# Altium PCB 遥控器.PcbDoc
Units mil, origin at the board's own origin, x right, y up, seen from the top; angles counter-clockwise.
Board outline 3937.01 x 1968.5 mil, 2 copper layers (Top Layer, Bottom Layer); 57 components, 45 nets, 221 pads, 92 vias.
Unrouted connection lines stored in the file: 56.
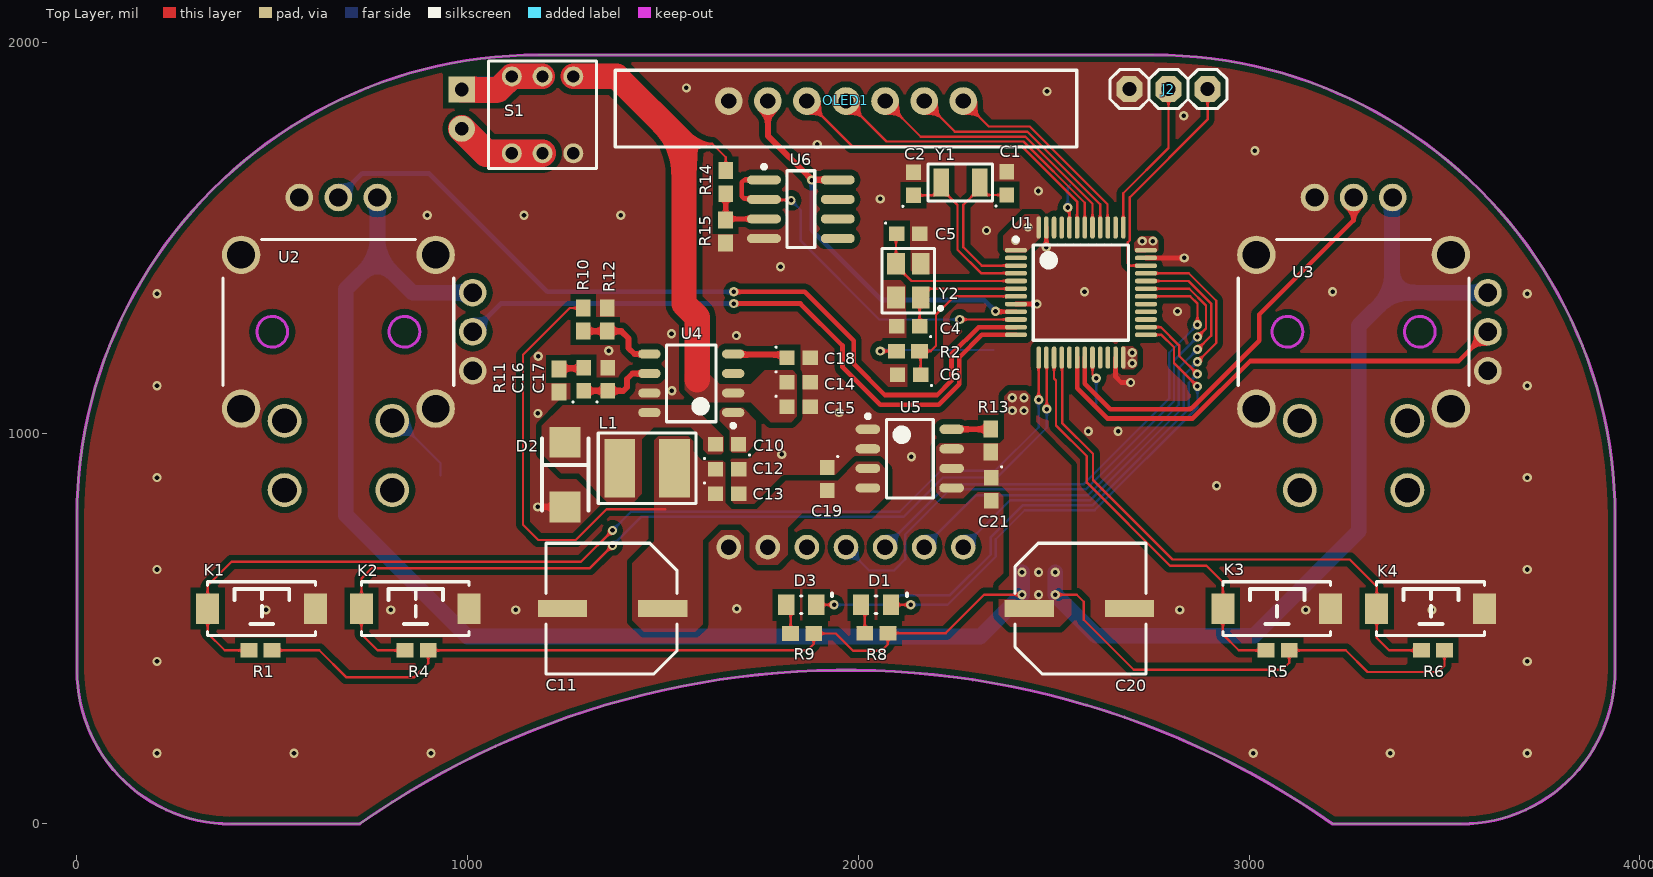
[diagram p0: Top Layer view]
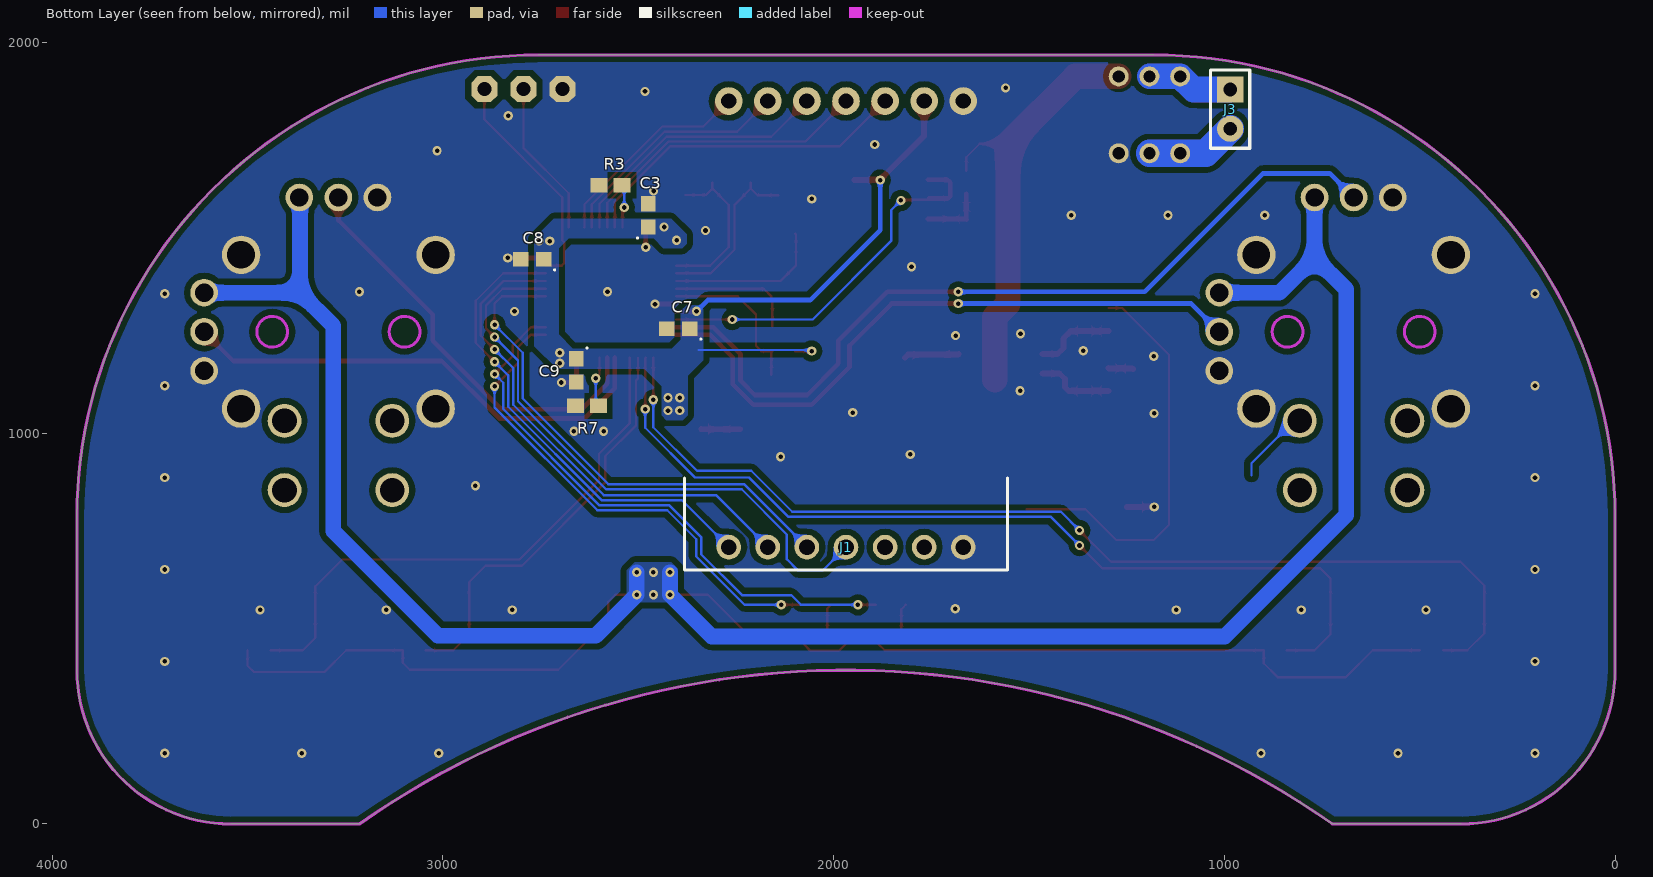
[diagram p1: Bottom Layer view, seen from below]

## Layer stack, top to bottom
Top Solder: solder mask 0.4, Solder Resist, Dk 3.5
Top Layer: signal copper 1.4
Dielectric 1: dielectric 12.6, FR-4, Dk 4.8
Bottom Layer: signal copper 1.4
Bottom Solder: solder mask 0.4, Solder Resist, Dk 3.5

## Board outline
393.7,0 cw(c393.7,393.7) 0,393.7 0,787.4 cw(c1181.1,787.4) 1181.1,1968.5 2755.91,1968.5 cw(c2755.91,787.4) 3937.01,787.4 3937.01,393.7 cw(c3543.31,393.7) 3543.31,0 3213.5,0 ccw(c1968.5,-1771.65) 724.01,0.35

## Design rules (kind name [scope] priority, off if disabled: settings)
Clearance "BOTTOM GND" [InNamedPolygon('Top Layer All GND')] p1: gap=15 ignorepadtopadclearanceinfootprint=FALSE
Clearance "TOP GND" [InNamedPolygon('Top Layer All GND')] p2: gap=15 ignorepadtopadclearanceinfootprint=FALSE
Clearance poly [InPolygon] p3: gap=9 ignorepadtopadclearanceinfootprint=FALSE
Clearance [All] p4: gap=6 ignorepadtopadclearanceinfootprint=FALSE
MinimumSolderMaskSliver [All] p1: minsoldermaskwidth=4
PlaneConnect [All] p1: planeconnectstyle=Direct reliefexpansion=20 reliefentries=4 reliefconductorwidth=10 reliefairgap=10
PolygonConnect [All] p1: connectstyle=Direct reliefconductorwidth=10 reliefentries=4 polygonreliefangle="90 Angle" airgapwidth=10
RoutingVias [All] p1: holewidth=11.81 width=23.62 viastyle="Through Hole" minholewidth=7.87 minwidth=19.68 maxholewidth=55.12 maxwidth=78.74
SilkToSilkClearance [All] p1: silktosilkclearance=0
SilkToSolderMaskClearance [IsPad] p1: minsilkscreentomaskgap=2 clearancetoexposedcopper=TRUE
SolderMaskExpansion [All] p1: expansion=4 istentingtop=FALSE
Width [All] p1: maxlimit=200 minlimit=6 preferedwidth=6
26 further rules are at their usual default settings.

## Components (designator, comment, footprint, x,y, rotation, side; value= is the part's Value field where it differs from the comment)
C1 "12pF" cap0603 2379.68,1639.5 r90 top
C2 "12pF" cap0603 2141.22,1638.57 r90 top
C3 "0.1uF" cap0603 2475.01,1557.5 r90 bottom
C4 "20pF" cap0603 2127.5,1274.37 r180 top
C5 "20pF" cap0603 2127.5,1510.94 r0 top
C6 "0.1uF" cap0603 2129.92,1149.44 r180 top
C7 "0.1uF" cap0603 2397.67,1267.85 r0 bottom
C8 "0.1uF" cap0603 2771.8,1445.44 r0 bottom
C9 "0.1uF" cap0603 2658.44,1160.77 r270 bottom
C10 "0.1uF" cap0603 1663.88,971.48 r180 top
C11 "470uF" Cap8x10.5mm 1496.06,551.18 r0 top
C12 "0.1uF" cap0603 1664.01,908.02 r0 top
C13 "0.1uF" cap0603 1664.01,845.4 r0 top
C14 "0.1uF" cap0603 1847.01,1130.33 r0 top
C15 "0.1uF" cap0603 1847.01,1067.7 r0 top
C16 "0.1uF" cap0603 1296.83,1138.01 r90 top
C17 "0.1uF" cap0603 1358.47,1138.01 r90 top
C18 "0.1uF" cap0603 1847.01,1193.26 r0 top
C19 "0.1uF" cap0603 1920.26,882.98 r270 top
C20 "470uF" Cap8x10.5mm 2440.94,551.18 r180 top
C21 "0.1uF" cap0603 2339.78,856.5 r270 top
D1 "LED" LED 2045.43,561.02 r0 top
D2 "SS54" SMA(DO-214AC) 1249.02,894.26 r270 top
D3 "LED" LED 1853.91,561.02 r0 top
J1 "1x7m" uart_nrf24l01 1968.5,708.66 r90 bottom locked
J2 "1X3" HDR-1X3_SWD 2894.02,1880.83 r180 top
J3 "1X2" HDR-1X2 985.15,1879.5 r270 bottom
K1 "KEY" key 472.44,551.18 r0 top locked
K2 "KEY" key 866.14,551.18 r0 top locked
K3 "KEY" key 3070.87,551.18 r0 top locked
K4 "KEY" key 3464.57,551.18 r0 top locked
L1 "10uH" CD43 1459.46,910.57 r90 top
OLED1 "2.541x7母排" LQ_OLED128X64去丝印 1968.5,1850.39 r0 top locked
R1 "1K" res0603 470.08,444.49 r180 top
R2 "10K" res0603 2127.56,1210.39 r0 top
R3 "10K" res0603 2571.33,1634.93 r0 bottom
R4 "1K" res0603 869.77,444.49 r180 top
R5 "1K" res0603 3073.41,444.49 r180 top
R6 "1K" res0603 3470.63,444.49 r180 top
R7 "10K" res0603 2631.83,1070.02 r0 bottom
R8 "1K" res0603 2045.99,488.6 r180 top
R9 "1K" res0603 1856.35,487.68 r180 top
R10 "10.2K" res0603 1296.13,1290.96 r270 top
R11 "Res" res0603 1233.93,1135.04 r270 top value=21K
R12 "1.91K" res0603 1357.47,1291.04 r90 top
R13 "Res" res0603 2338.95,981.3 r90 top value=250K
R14 "Res" res0603 1660.7,1642.65 r270 top value=30K
R15 "10K" res0603 1659.95,1516.89 r270 top
S1 "自锁开关" 6pswitch7*7mm 1191.83,1814.98 r0 top
U1 "STM32F103C8T6" LQFP-48_7x7x05P 2569.88,1360.21 r0 top locked
U2 "手柄摇杆电位器" 摇杆 669.29,1259.84 r0 top locked
U3 "手柄摇杆电位器" 摇杆 3267.72,1259.84 r0 top locked
U4 "TPS54231DR" SOIC-8_150mil 1572.59,1128.02 r180 top
U5 "TPS7333" SOP8 2131.78,935.17 r0 top
U6 "LMV358" OPA2350 1853.07,1573.63 r0 top
Y1 "32.768K" SMD3215 2261.31,1642.05 r180 top
Y2 "8MHz" SMD3225 2128.02,1390.83 r90 top

## Footprints (in the part's own frame and the unit in brackets; to place one, negate y for a bottom-side part, rotate by r counter-clockwise, add the part's x,y. Pads: shape width x height; smd on the part's side, far side on the other; paste and mask are expansions set on the pad)
6pswitch7*7mm [mm]
  round 1.3 hole 0.8: 1(2,2.5) 2(0,2.5) 3(-2,2.5) 4(-2,-2.5) 5(0,-2.5) 6(2,-2.5)
  silkscreen extent -3.5,-3.5 3.5,3.5
Cap8x10.5mm [mm] "for 470uf"
  rect 3.2x1.1 smd: 1(0.089,0) 2(-6.439,0)
  silkscreen extent -7.5,-4.25 1,4.25, body extent -7.5,-4 0.5,4, height 10
cap0603 [mm] "Chip Capacitor, 2-Leads, Body 1.60x0.80mm, IPC Medium Density"
  rect 1x0.95 smd: 1(-0.75,0) 2(0.75,0)
  silkscreen extent -1.51,0.64 -1.41,0.74, body extent -0.85,-0.45 0.85,0.45, height 0.6
CD43 [mm]
  rect 3.8x2 smd: 1(0,1.778) 2(0,-1.778)
  silkscreen extent -2.29,-3.17 2.29,3.18, body extent -2,-2.54 2,2.54, height 3.7
HDR-1X2 [mm]
  rect 1.7x1.7 hole 0.9: 1(0,0)
  round 1.7 hole 0.9: 2(2.54,0)
  silkscreen extent -1.27,-1.27 3.81,1.27, body extent -1.27,-1.27 3.81,1.27, height 8.5
HDR-1X3_SWD [mm]
  oct 1.7x1.7 hole 0.9: 1(0,0) 2(2.54,0) 3(5.08,0)
  silkscreen extent -1.27,-1.27 6.35,1.27
key [mm] "3*6*2.5"
  rect 1.5x2 smd: 1(3.5,0) 2(-3.5,0)
  silkscreen extent -3.5,-1.75 3.5,1.75, body extent -3.97,-1.74 4.03,1.76, height 2.59
LED [mm] "0805"
  rect 1.05x1.35 smd: 1(-0.975,0) 2(0.975,0)
  silkscreen extent -0.05,-0.58 2,0.75, body extent -1.05,-0.67 1.05,0.67, height 0.6
LQ_OLED128X64去丝印 [mm]
  round 1.8 hole 1: 1(-7.62,0) 2(-5.08,0) 3(-2.54,0) 4(0,0) 5(2.54,0) 6(5.08,0) 7(7.62,0)
  round 1.8 on Top Overlay: ""(-13.307,0.105) ""(13.293,0.105)
  silkscreen extent -15,-3 15,2, body extent -15,-23 15,2, height 8.5
LQFP-48_7x7x05P [mm]
  oval 1.45x0.3 smd: 1(-4.225,2.75) 2(-4.225,2.25) 3(-4.225,1.75) 4(-4.225,1.25) 5(-4.225,0.75) 6(-4.225,0.25) 7(-4.225,-0.25) 8(-4.225,-0.75) 9(-4.225,-1.25) 10(-4.225,-1.75) 11(-4.225,-2.25) 12(-4.225,-2.75) 25(4.225,-2.75) 26(4.225,-2.25) 27(4.225,-1.75) 28(4.225,-1.25) 29(4.225,-0.75) 30(4.225,-0.25) 31(4.225,0.25) 32(4.225,0.75) 33(4.225,1.25) 34(4.225,1.75) 35(4.225,2.25) 36(4.225,2.75)
  oval 0.3x1.45 smd: 13(-2.75,-4.225) 14(-2.25,-4.225) 15(-1.75,-4.225) 16(-1.25,-4.225) 17(-0.75,-4.225) 18(-0.25,-4.225) 19(0.25,-4.225) 20(0.75,-4.225) 21(1.25,-4.225) 22(1.75,-4.225) 23(2.25,-4.225) 24(2.75,-4.225) 37(2.75,4.225) 38(2.25,4.225) 39(1.75,4.225) 40(1.25,4.225) 41(0.75,4.225) 42(0.25,4.225) 43(-0.25,4.225) 44(-0.75,4.225) 45(-1.25,4.225) 46(-1.75,4.225) 47(-2.25,4.225) 48(-2.75,4.225)
  silkscreen extent -4.35,-3.1 3.1,3.57, body extent -3.5,-3.5 3.5,3.5, height 1.6
OPA2350 [mm] "SOIC, 8-Leads, Body 4.9x3.9mm, Pitch 1.27mm, IPC Medium Density"
  oval 2.2x0.6 smd: 1(-2.4,1.905) 2(-2.4,0.635) 3(-2.4,-0.635) 4(-2.4,-1.905) 5(2.4,-1.905) 6(2.4,-0.635) 7(2.4,0.635) 8(2.4,1.905)
  silkscreen extent -2.52,-2.5 0.9,2.88, body extent -1.95,-2.45 1.95,2.45, height 1.75
res0603 [mm]
  rect 1.1x0.95 smd: 1(-0.75,0) 2(0.75,0)
  body extent -0.8,-0.38 0.8,0.42, height 0.45
SMA(DO-214AC) [mm] "SS系列肖特基二极管"
  rect 2x2 smd: 1(2.1,0) 2(-2.1,0)
  silkscreen extent -2.35,-1.5 2.35,1.52
SMD3215 [mm] "有源晶振"
  rect 1x1.8 smd: 1(-1.25,0) 2(1.25,0)
  silkscreen extent -2.1,-1.2 2.1,1.2
SMD3225 [mm] "有源晶振"
  rect 1.4x1.15 smd: 1(-1.1,-0.8) 2(1.1,-0.8) 3(1.1,0.8) 4(-1.1,0.8)
  silkscreen extent -2.1,-2.2 2.1,1.7
SOIC-8_150mil [mm]
  oval 1.45x0.6 smd: 1(-2.725,1.905) 2(-2.725,0.635) 3(-2.725,-0.635) 4(-2.725,-1.905) 5(2.725,-1.905) 6(2.725,-0.635) 7(2.725,0.635) 8(2.725,1.905)
  silkscreen extent -2.85,-2.5 1.6,2.88, body extent -2,-2.5 2,2.5, height 1.75
SOP8 [mm] "SOP, 8-Leads, Body 5.1x4.1mm (max), Pitch 1.27mm, IPC Medium Density"
  oval 1.6x0.6 smd: 1(-2.725,1.905) 2(-2.725,0.635) 3(-2.725,-0.635) 4(-2.725,-1.905) 5(2.725,-1.905) 6(2.725,-0.635) 7(2.725,0.635) 8(2.725,1.905)
  silkscreen extent -2.85,-2.55 1.52,2.88, body extent -2.06,-2.56 2.06,2.57, height 1.8
uart_nrf24l01 [mm] "无线串口模块"
  round 1.6 hole 1.02: 1(0,7.62) 2(0,5.08) 3(0,2.54) 4(0,0) 5(0,-2.54) 6(0,-5.08) 7(0,-7.62)
  silkscreen extent -1.5,-10.5 4.5,10.5, body extent -1.5,-10.5 45.55,10.5, height 6.1
摇杆 [mm]
  round 1.8 hole 1.2: 1(8.73,-2.54) 2(8.73,0) 3(8.73,2.54) 4(2.54,8.73) 5(0,8.73) 6(-2.54,8.73)
  round 2.5 hole 1.8: 7(-6.325,5) 8(-6.325,-5) 9(6.325,-5) 10(6.325,5)
  round 2.2 hole 1.6: a(-3.5,-5.792) b(-3.5,-10.292) c(3.5,-5.792) d(3.5,-10.292)
  Keep-Out Layer circle w0.2: c-4.3,0 r1
  Keep-Out Layer circle w0.2: c4.3,0 r1
  silkscreen extent -7.5,-3.5 7.5,6

## Part data
C1 C2 C3 C4 C5 C6 C7 C8 C9 C10 C12 C13 C14 C15 C16 C17 C18 C19 C21: library part Cap, "贴片电容", LatestRevisionDate=17-Jul-2002, LatestRevisionNote="Re-released for DXP Platform.", PackageReference=RAD-0.3, Published=8-Jun-2000, Publisher="Altium Limited"
C11 C20: library part "Cap Pol", "贴片电解电容 8*10.5mm", LatestRevisionDate=17-Jul-2002, LatestRevisionNote="Re-released for DXP Platform.", PackageReference=POLAR0.8, Published=8-Jun-2000, Publisher="Altium Limited"
D1 D3: "贴片0805", PackageDocument=Feb-2002, LatestRevisionDate=17-Jul-2002, LatestRevisionNote="Re-released for DXP Platform.", PackageReference=3.2X1.6X1.1, Published=8-Jun-2000, Publisher="Altium Limited"
D2: library part "D Schottky", "Schottky Diode", Code_JEDEC=DO-214-AA, LatestRevisionDate=17-Jul-2002, LatestRevisionNote="Re-released for DXP Platform.", PackageReference=SMB, Published=8-Jun-2000, Publisher="Altium Limited"
J1: library part 无线串口模块, "2.54mm母排座"
J2: library part "Header 3", "2.54mm公排针", BOM名称=3P接插件, 版权归属=源创客, 学习资源=www.ooocke.com
J3: library part "Header 2", "不用焊", BOM名称=2P接插件, 版权归属=源创客, 学习资源=www.ooocke.com
K1 K2 K3 K4: "按键", BOM名称=3x6轻触开关, 版权归属=源创客, 学习资源=www.ooocke.com
L1: library part Inductor, "贴片功率电感", Code_IEC=1005, Code_JEITA=0402, LatestRevisionDate=17-Jul-2002, LatestRevisionNote="Re-released for DXP Platform.", PackageReference=0402-A, Published=8-Jun-2000, Publisher="Altium Limited"
OLED1: library part OLED
R1 R2 R3 R4 R5 R6 R7 R8 R9 R10 R12 R15: library part Res, "贴片电阻", LatestRevisionDate=17-Jul-2002, LatestRevisionNote="Re-released for DXP Platform.", PackageReference=AXIAL-0.4, Published=8-Jun-2000, Publisher="Altium Limited"
R11 R13 R14: "贴片电阻", LatestRevisionDate=17-Jul-2002, LatestRevisionNote="Re-released for DXP Platform.", PackageReference=AXIAL-0.4, Published=8-Jun-2000, Publisher="Altium Limited"
S1: "按键六脚开关,自锁7*7mm"
U2 U3: "型号RKJXV1224005"
U4: "DC-DC芯片,3.5V~28V输入,2A输出"
U5: "TPS73系列电源IC"
U6: "运放", Code_IPC=SOIC127P600-8, Code_JEDEC=MS-012-AA, ComponentLink1Description="Manufacturer Link", ComponentLink1URL=http://www.onsemi.com/site/products/parametrics/0,4446,251,00.html, ComponentLink2Description=Datasheet, ComponentLink2URL=http://www.onsemi.com/pub/Collateral/LM358-D.PDF, DatasheetVersion=1988, LatestRevisionDate=13-Apr-2006, LatestRevisionNote="IPC-7351 Footprint Added.", PackageDescription="8-Pin Small Outline Integrated Circuit 1.27 mm Pitch", PackageReference=751-02, Published=17-Jul-2002, Publisher="Altium Limited"
Y1: library part CRYSTAL, "晶振 32.768KHZ 12.5PF"
Y2: library part CRYSTAL_JXS63, "无源晶振 8MHZ 20pF 3.2X2.5MM SMD"

## Via types
v1: diameter 23.62, hole 11.81, Top Layer to Bottom Layer, tented both sides, 92 vias

## Nets (pads, with @x,y where several pads share a name; then routed paths per layer and width w, separated by ;. In a path a pad name is that pad's centre, name@x,y a point inside that pad or via, vN(x,y) a via of type N, cw(c..) or ccw(c..) an arc to the next point about the centre after c; other vN are vias at no path point)
3.3V: C3.1 C7.1 C8.1 C9.1 C20.1 C21.1 OLED1.2 R1.1 R2.1 R4.1 R5.1 R6.1 R8.1 R9.1 R13.1 U1.1 U1.9 U1.24 U1.36 U1.48 U2.3 U2.4 U3.3 U3.4 U5.5 U5.6 U5.7 U6.8 | length 9931.5
  Top Layer w6: R1.1 620.51,444.49 689,376 864,376 899.3,411.3 R4.1 1869.49,444.49 1885.87,460.87 R9.1 1942.32,487.68 1987,443 2059,443 2075.52,459.52 R8.1 2223.6,488.6 2322,587 v1(2419,587) ; v1(2056.39,1210.39) R2.1 ; v1(2504,587) 2559,587 2577,569 2577,523 2705,395 3085,395 3102.94,412.94 R5.1 3247.51,444.49 3303,389 3484,389 3500.16,405.16 R6.1
  Top Layer w12: v1(2351,1312.13) 2352.03,1311.09 2403.44,1311.09 U1.9
  Top Layer w15: U2.4@769.29,1602.96 769,1603.25 U2.4 ; OLED1.2 1768.5,1761.5 1881.37,1648.63 U6.8
  Bottom Layer w6: v1(2056.39,1210.39) 2059,1213 2345,1213
  Bottom Layer w12: v1(1881,1648) 1881,1520 2060,1341 2322.13,1341 v1(2351,1312.13)
  Bottom Layer w40: U2.4 769.29,1449.71 ; U2.3 859.16,1359.84 769.29,1449.71 ; v1(2419,644.33) v1(2419,587) 2312,480 999,480 688,791 688,1368.42 769.29,1449.71 ; v1(2504,644.33) v1(2504,587) 2609,482 3013,482 3281,750 3281,1275 3365.84,1359.84 ; U3.4 3365.84,1601.67 3365.84,1359.84 ; U3.3 3365.84,1359.84
  other v1: 2461.5,587 2461.5,644.33 2394,1058 2424,1058 2394,1091 2424,1091 2701,1179 2701,1206 2727,1492 2754,1492 2402,1494 2434,1528
5V: C11.1 C12.1 C13.1 C19.2 J1.6 L1.2 R10.1 U5.3 U5.4 | length 1051.5
  Top Layer w6: R10.1 1261.49,1320.49 1142,1201 1142,766 1181,727 1277,727 1356,806 1506,806
ADC_BAT: U1.10 U6.1 U6.2 | length 973.2
  Top Layer w6: U6.2@1756.36,1600.85 U6.2 1759.9,1597.31 1826.69,1597.31 v1(1828,1596) ; v1(2259.68,1291.32) U1.10
  Top Layer w12: U6.2@1756.36,1600.85 1708.15,1600.85 1702,1607 1702,1641.97 1709.03,1649 1758.21,1649 U6.1
  Bottom Layer w6: v1(1828,1596) 1853,1571 1853,1492 2053.68,1291.32 v1(2259.68,1291.32)
DC_IN: C14.1 C15.1 R14.1 S1.1 U4.2 | length 1128.1
  Top Layer w6: 1554,1741 1626,1741 1660.7,1706.3 R14.1
  Top Layer w65: S1.1 1381.6,1913.4 1554,1741 1554,1331 1588,1297 1588,1137
GND: C1.2 C2.2 C3.2 C4.2 C5.2 C6.2 C7.2 C8.2 C9.2 C11.2 C12.2 C13.2 C14.2 C15.2 C17.2 C18.2 C19.1 C20.2 C21.2 D2.1 J1.7 J2.3 K1.1 K2.1 K3.1 K4.1 OLED1.1 R3.2 R7.2 R11.2 R12.2 R15.2 S1.6 U1.8 U1.23 U1.35 U1.47 U2.1 U2.6 U2.7 U2.8 U2.9 U2.10 U3.1 U3.6 U3.7 U3.8 U3.9 U3.10 U4.7 U5.1 U5.2 U6.4 Y2.2 Y2.4 | length 365.7
  Top Layer w12: U1.8 v1(2457.31,1330.69) ; v1(2481.3,1476) U1.47 ; U1.23 2658.46,1144.54 2673,1130 v1(2697,1130) ; U1.35 v1(2834.2,1448.8)
  Top Layer w15: v1(1179.58,811.58) D2.1
  other v1: 205,181 555.7,181 906.4,181 3010.6,181 3361.3,181 3712,181 205,416.2 3712,416.2 484,548 803.5,548 1123,548 2823,548 3145.5,548 3468,548 1689,551 205,651.4 3712,651.4 2917,866 205,886.6 3712,886.6 2136,940 1804,946 2589,1005 2665,1005 1180,1051 1951,1053 1523,1109 205,1121.8 3712,1121.8 1181,1197 1361,1211 1688,1250 1522,1255 2817,1312 205,1357 3712,1357 2579,1362 3214,1362 1801,1426 2328,1519 897,1558 1144.5,1558 1392,1558 2056,1600 2461,1620 3015,1723 1895,1739 2833,1813 2483,1875 1560,1884
KEY1: K1.2 R1.2 U1.13 | length 2718.7
  Top Layer w6: R1.2 378.51,444.49 334.65,488.35 K1.2 334.65,609.65 396,671 1290.38,671 v1(1370.88,751.5) ; v1(2461.61,1085.61) U1.13
  Bottom Layer w6: v1(1370.88,751.5) 1418.38,799 2106,799 2211,904 2350,904 2461.61,1015.61 v1(2461.61,1085.61)
KEY2: K2.2 R4.2 U1.14 | length 2365.6
  Top Layer w6: R4.2 769.51,444.49 728.35,485.65 K2.2 728.35,628.35 755,655 1313,655 v1(1370.88,712.88) ; U1.14 2482.42,1192.75 v1(2482.42,1062)
  Bottom Layer w6: v1(1370.88,712.88) 1444,786 2116,786 2217,887 2355,887 2482.42,1014.42 v1(2482.42,1062)
KEY3: K3.2 R5.2 U1.15 | length 1070.1
  Top Layer w6: U1.15 2500.98,1140.02 2506,1135 2506,1020 2585,941 2585,873.82 2797.82,661 2891,661 2933.07,618.93 K3.2 2933.07,484.93 2973.51,444.49 R5.2
KEY4: K4.2 R6.2 U1.16 | length 1444.5
  Top Layer w6: U1.16@2521.69,1193.87 2521.69,1026.5 2600.69,947.5 2600.69,880.31 2804,677 3258,677 3326.77,608.23 K4.2 3326.77,476.23 3358.51,444.49 R6.2
L_X: U1.12 U2.2 | length 1673.5
  Top Layer w12: v1(1681,1332) 1852,1332 1959.31,1224.68 1959.31,1169.85 2055.85,1073.32 2205.31,1073.32 2258,1126 2258,1194 2315.95,1251.95 U1.12
  Bottom Layer w12: U2.2 1085.15,1332 v1(1681,1332)
L_Y: U1.11 U2.5 | length 2140.9
  Top Layer w12: v1(1681,1362) 1863,1362 1988,1237 1988,1178 2068,1098 2202.16,1098 2238.31,1134.15 2238.31,1202.15 2307.79,1271.63 U1.11
  Bottom Layer w12: U2.5 730.75,1665 901,1665 1204,1362 v1(1681,1362)
LED1: D1.2 U1.25 | length 1283
  Top Layer w6: D1.2 v1(2133.98,561.02) ; U1.25 2776.05,1251.95 2808,1220 2808,1180 v1(2868,1120)
  Bottom Layer w6: v1(2133.98,561.02) 2228.02,561.02 2352,685 2352,729 2425.82,802.82 2604.82,802.82 2868,1066 v1(2868,1120)
LED2: D3.2 U1.26 | length 1482.7
  Top Layer w6: D3.2 v1(1937.98,561.02) ; U1.26 2774.37,1271.63 2821,1225 2821,1198.6 v1(2868,1151.6)
  Bottom Layer w6: v1(1937.98,561.02) 2084.02,561.02 2108.73,585.73 2234.73,585.73 2339.27,690.27 2339.27,734.27 2420.55,815.55 2599.55,815.55 2846,1062 2846,1129.6 v1(2868,1151.6)
NetC1_1: C1.1 U1.3 Y1.1 | length 413.3
  Top Layer w6: Y1.1 Y1.1@2310.53,1626.66 ; C1.1 2327.21,1609.97 Y1.1@2310.53,1626.66 ; U1.3 2315.89,1429.11 2269,1476 2269,1584.77 2310.53,1626.3 Y1.1@2310.53,1626.66
NetC2_1: C2.1 U1.4 Y1.2 | length 442.2
  Top Layer w6: C2.1 2194.85,1609.04 Y1.2@2212.1,1626.3 ; Y1.2 Y1.2@2212.1,1626.3 ; U1.4 2403.08,1409.89 2313.9,1409.89 2254,1469.79 2254,1584.4 Y1.2@2212.1,1626.3
NetC4_1: C4.1 U1.6 Y2.1 | length 329.2
  Top Layer w6: C4.1 2157.03,1345.03 Y2.1 2159.52,1350.42 2179.16,1370.06 U1.6
NetC5_1: C5.1 U1.5 Y2.3 | length 405.7
  Top Layer w6: C5.1 2096.53,1509.49 Y2.3 2096.53,1429.21 2136,1389.74 U1.5
NetC10_1: C10.1 U4.1
NetC10_2: C10.2 D2.2 L1.1 U4.8
NetC16_1: C16.1 C17.1 U4.6 | length 199.2
  Top Layer w15: C16.1 C17.1 1398.48,1108.48 1408,1118 1408,1139 1422.02,1153.02 U4.6
NetC16_2: C16.2 R11.1 | length 64.1
  Top Layer w15: R11.1 1235.42,1166.05 1295.34,1166.05 C16.2
NetC18_1: C18.1 U4.4 | length 141.6
  Top Layer w15: U4.4 1681.52,1201.37 1809.37,1201.37 C18.1
NetD1_1: D1.1 R8.2 | length 76.3
  Top Layer w6: D1.1 2016.46,551.61 R8.2
NetD3_1: D3.1 R9.2 | length 78
  Top Layer w6: D3.1 1826.82,549.72 R9.2
NetJ3_1: J3.1 S1.2 S1.3 | length 442.2
  Top Layer w65: J3.1 986.11,1878.53 1078.22,1878.53 S1.3 S1.2
  Bottom Layer w65: J3.1 1079.18,1879.5 S1.3 S1.2
NetJ3_2: J3.2 S1.4 S1.5 | length 465.5
  Top Layer w70: J3.2 1048.1,1716.55 S1.4 S1.5
  Bottom Layer w70: J3.2 1048.1,1716.55 S1.4 S1.5
NetR3_1: R3.1 U1.44 | length 112.6
  Top Layer w6: v1(2536,1578) 2540.35,1573.65 U1.44
  Bottom Layer w6: v1(2536,1578) 2536,1629.13 R3.1
NetR7_1: R7.1 U1.20 | length 130.6
  Top Layer w6: U1.20 2599.41,1150.59 v1(2609,1141)
  Bottom Layer w6: R7.1 2609,1076.72 v1(2609,1141)
NetR10_2: R10.2 R12.1 U4.5 | length 208.1
  Top Layer w15: R10.2 R10.2 R12.1 R12.1 1393.49,1261.51 1412,1243 1412,1218 1427,1203 U4.5
NetR13_2: R13.2 U5.8 | length 100.2
  Top Layer w15: U5.8 2239.39,1010.5 2338.62,1010.5 R13.2
NetR14_2: R14.2 R15.1 U6.3 | length 165.5
  Top Layer w12: R15.1 R15.1@1660.7,1547.17 ; R14.2 R15.1@1660.7,1547.17 ; U6.3 1662.16,1548.63 R15.1@1660.7,1547.17
NRST: C6.1 R2.2 U1.7 | length 413.2
  Top Layer w6: C6.1 2159.44,1208.03 R2.2 2185.39,1210.39 2199,1224 2199,1304 2245.37,1350.37 U1.7
OLED_CLK: OLED1.3 U1.43 | length 864.6
  Top Layer w6: OLED1.3 1983.9,1735 2418,1735 2560.04,1592.96 U1.43
OLED_CS: OLED1.7 U1.39 | length 538.8
  Top Layer w6: OLED1.7 2333.69,1785.2 2438.8,1785.2 2637.66,1586.34 2637.66,1527.66 U1.39
OLED_DC: OLED1.6 U1.40 | length 619.5
  Top Layer w6: OLED1.6 2247.13,1771.77 2433.23,1771.77 2619.09,1585.91 U1.40
OLED_RST: OLED1.5 U1.41 | length 700.8
  Top Layer w6: OLED1.5 2159.88,1759.02 2427.95,1759.02 2599.41,1587.57 U1.41
OLED_SDA: OLED1.4 U1.42 | length 782.7
  Top Layer w6: OLED1.4 2071.88,1747.02 2422.98,1747.02 2579.72,1590.28 U1.42
PA11: J1.2 U1.32 | length 1286.5
  Top Layer w6: U1.32 2845.26,1389.74 2903,1332 2903,1249.8 v1(2868,1214.8)
  Bottom Layer w6: J1.2 2301.56,841.72 2588.72,841.72 2820,1073 2820,1166.8 v1(2868,1214.8)
PA12: J1.1 U1.33 | length 1227.7
  Top Layer w6: U1.33 2845.57,1409.43 2916,1339 2916,1231.2 v1(2868,1183.2)
  Bottom Layer w6: J1.1 2388.83,828.99 2593.99,828.99 2833,1068 2833,1148.2 v1(2868,1183.2)
R_X: U1.18 U3.2 | length 1254.1
  Top Layer w12: U1.18 U1.18 2560.04,1193.8 2560.04,1114.96 2637,1038 2856,1038 3003,1185 3536.57,1185 U3.2
R_Y: U1.19 U3.5 | length 1078.3
  Top Layer w12: U1.19 2579.72,1127.28 2645.19,1061.81 2845.84,1061.81 ccw(c2845.84,1073.81) 2854.3,1065.3 3026,1237 3026,1304 3266.67,1544.67 ; 3267.72,1544.67 U3.5
SWD_TCK: J2.2 U1.37 | length 402.3
  Top Layer w6: U1.37 2678.15,1614.15 2794.02,1730.02 J2.2
SWD_TMS: J2.1 U1.34 | length 579
  Top Layer w6: U1.34 2695.89,1429.11 2690,1435 2690,1489 2695,1494 2695,1604 2894.02,1803.02 J2.1
UART_RX: J1.4 U1.31 | length 1531
  Top Layer w6: U1.31 2846.91,1370.06 2890,1326.97 2890,1268.4 v1(2868,1246.4)
  Bottom Layer w6: J1.4 2028.17,649 2091,649 2120,678 2120,741 2235.56,856.57 2582.56,856.57 2808,1082 2808,1186.4 v1(2868,1246.4)
UART_TX: J1.3 U1.30 | length 1297.3
  Top Layer w6: U1.30 2849.63,1350.37 2868,1332 v1(2868,1278)
  Bottom Layer w6: J1.3 2229.84,870 2577,870 2796,1089 2796,1206 v1(2868,1278)
pads on no net: J1.5 OLED1. U1.2 U1.17 U1.21 U1.22 U1.27 U1.28 U1.29 U1.38 U1.45 U1.46 U2.a U2.b U2.c U2.d U3.a U3.b U3.c U3.d U4.3 U6.5 U6.6 U6.7
copper on no net: | length 202
  Bottom Layer w6: 807.09,1031.81 827.19,1031.81 827.19,1026.83 930.59,923.43 930.59,892.77

## Polygon pours and split planes (outlines as drawn)
GND on Top Layer "Top Layer All GND" (solid, pour order 16): 393.7,0 cw(c393.7,393.7) 0,393.7 0,787.4 cw(c1181.1,787.4) 1181.1,1968.5 2755.91,1968.5 cw(c2755.91,787.4) 3937.01,787.4 3937.01,393.7 cw(c3543.31,393.7) 3543.31,0 3213.5,0 ccw(c1968.5,-1771.65) 724.01,0.35
3.3V on Top Layer "Top Layer-3.3V" (solid, remove dead copper, pour order 6): 2199,849 2214,834 2269,834 2299,864 2367,864 2386,845 2386,636 2359,609 2359,535 2389,505 2516,505 2545,534 2545,918 2440,1023 2440,1097 2428,1109 2387,1109 2373,1095 2373,986 2362,975 2209,975 2199,965
5V on Top Layer "5V_L01_P003" (solid, remove dead copper, pour order 3): 1478,724 1422,668 1422,521 1451,492 1583,492 1602,511 1602,726 1643,767 1699,767 1722,744 1722,683 1742,663 1794,663 1820,689 1820,758 1857,795 2028,795 2073,840 2073,906 2052,927 1995,927 1947,879 1814,879 1740,805 1676,805 1659,822 1659,924 1653,930 1601,930 1577,954 1577,980 1565,992 1488,992 1478,982 1478,965
3.3V on Top Layer "3.3V_L01_P010" (solid, pour order 10): 2672,1169 2677,1164 2705,1164 2714,1173 2714,1212 2703,1223 2676,1223 2672,1219
3.3V on Top Layer "3.3V_L01_P009" (solid, pour order 9): 2711,1463 2706,1468 2706,1488 2722,1504 2758,1504 2768,1494 2768,1469 2762,1463
3.3V on Top Layer "3.3V_L01_P008" (solid, remove dead copper, pour order 8): 2429,1463 2468,1502 2468,1553 2461,1560 2426,1560 2371,1505 2371,1470 2378,1463
no net on Top Layer "NONET_L01_P007" (solid, remove dead copper, pour order 7): 2371,1476
NetC10_2 on Top Layer "NETC10_2_L01_P002" (solid, remove dead copper, pour order 2): 1190,1019 1190,948 1240,898 1284,898 1358,824 1425,824 1446,845 1446,985 1476,1015 1571,1015 1603,983 1603,958 1615,946 1649,946 1656,953 1656,991 1575,1072 1243,1072
NetC10_1 on Top Layer "NETC10_1_L01_P001" (solid, remove dead copper, pour order 1): 1653,1065 1705,1065 1738,1032 1738,974 1714,950 1677,950 1671,956 1671,1007 1646,1032 1646,1058
DC_IN on Top Layer "DC_IN_L01_P000" (solid, remove dead copper, pour order 0): 1645,1125 1725,1125 1761,1161 1832,1161 1843,1150 1843,1043 1828,1028 1776,1028 1725,1079 1589,1079 1556,1112 1556,1151 1619,1151
GND on Bottom Layer "Top Layer All GND" (solid, pour order 17): 393.7,0 cw(c393.7,393.7) 0,393.7 0,787.4 cw(c1181.1,787.4) 1181.1,1968.5 2755.91,1968.5 cw(c2755.91,787.4) 3937.01,787.4 3937.01,393.7 cw(c3543.31,393.7) 3543.31,0 3213.5,0 ccw(c1968.5,-1771.65) 724.01,0.35
3.3V on Bottom Layer "3.3V_L02_P015" (solid, remove dead copper, pour order 15): 2399,590 2422,567 2511,567 2530,586 2530,649 2509,670 2416,670 2399,653
3.3V on Bottom Layer "Bottom Layer-3.3V" (solid, remove dead copper, pour order 14): 2374,1046 2386,1034 2428,1034 2440,1046 2440,1120 2485,1165 2708,1165 2766,1223 2766,1499 2716,1549 2416,1549 2376,1509 2376,1485 2387,1474 2436,1474 2461,1499 2678,1499 2704,1473 2704,1253 2668,1217 2414,1217 2391,1240 2391,1313 2376,1328 2345,1328 2334,1317 2334,1187 2374,1147

## Keep-outs
Keep-Out Layer:
  lines w7.87: 393.7,0 cw(c393.7,393.7) 0,393.7 0,787.4 cw(c1181.1,787.4) 1181.1,1968.5 2755.91,1968.5 cw(c2755.91,787.4) 3937.01,787.4 3937.01,393.7 cw(c3543.31,393.7) 3543.31,0 3213.5,0 ccw(c1968.5,-1771.65) 724.01,0.35 394.05,0.35